# Altium PCB Sub8KillBoard.PcbDoc
Units mil, origin at the board's own origin, x right, y up, seen from the top; angles counter-clockwise.
Board outline 3250 x 2500 mil, 2 copper layers (Top Layer, Bottom Layer); 77 components, 51 nets, 253 pads, 65 vias.
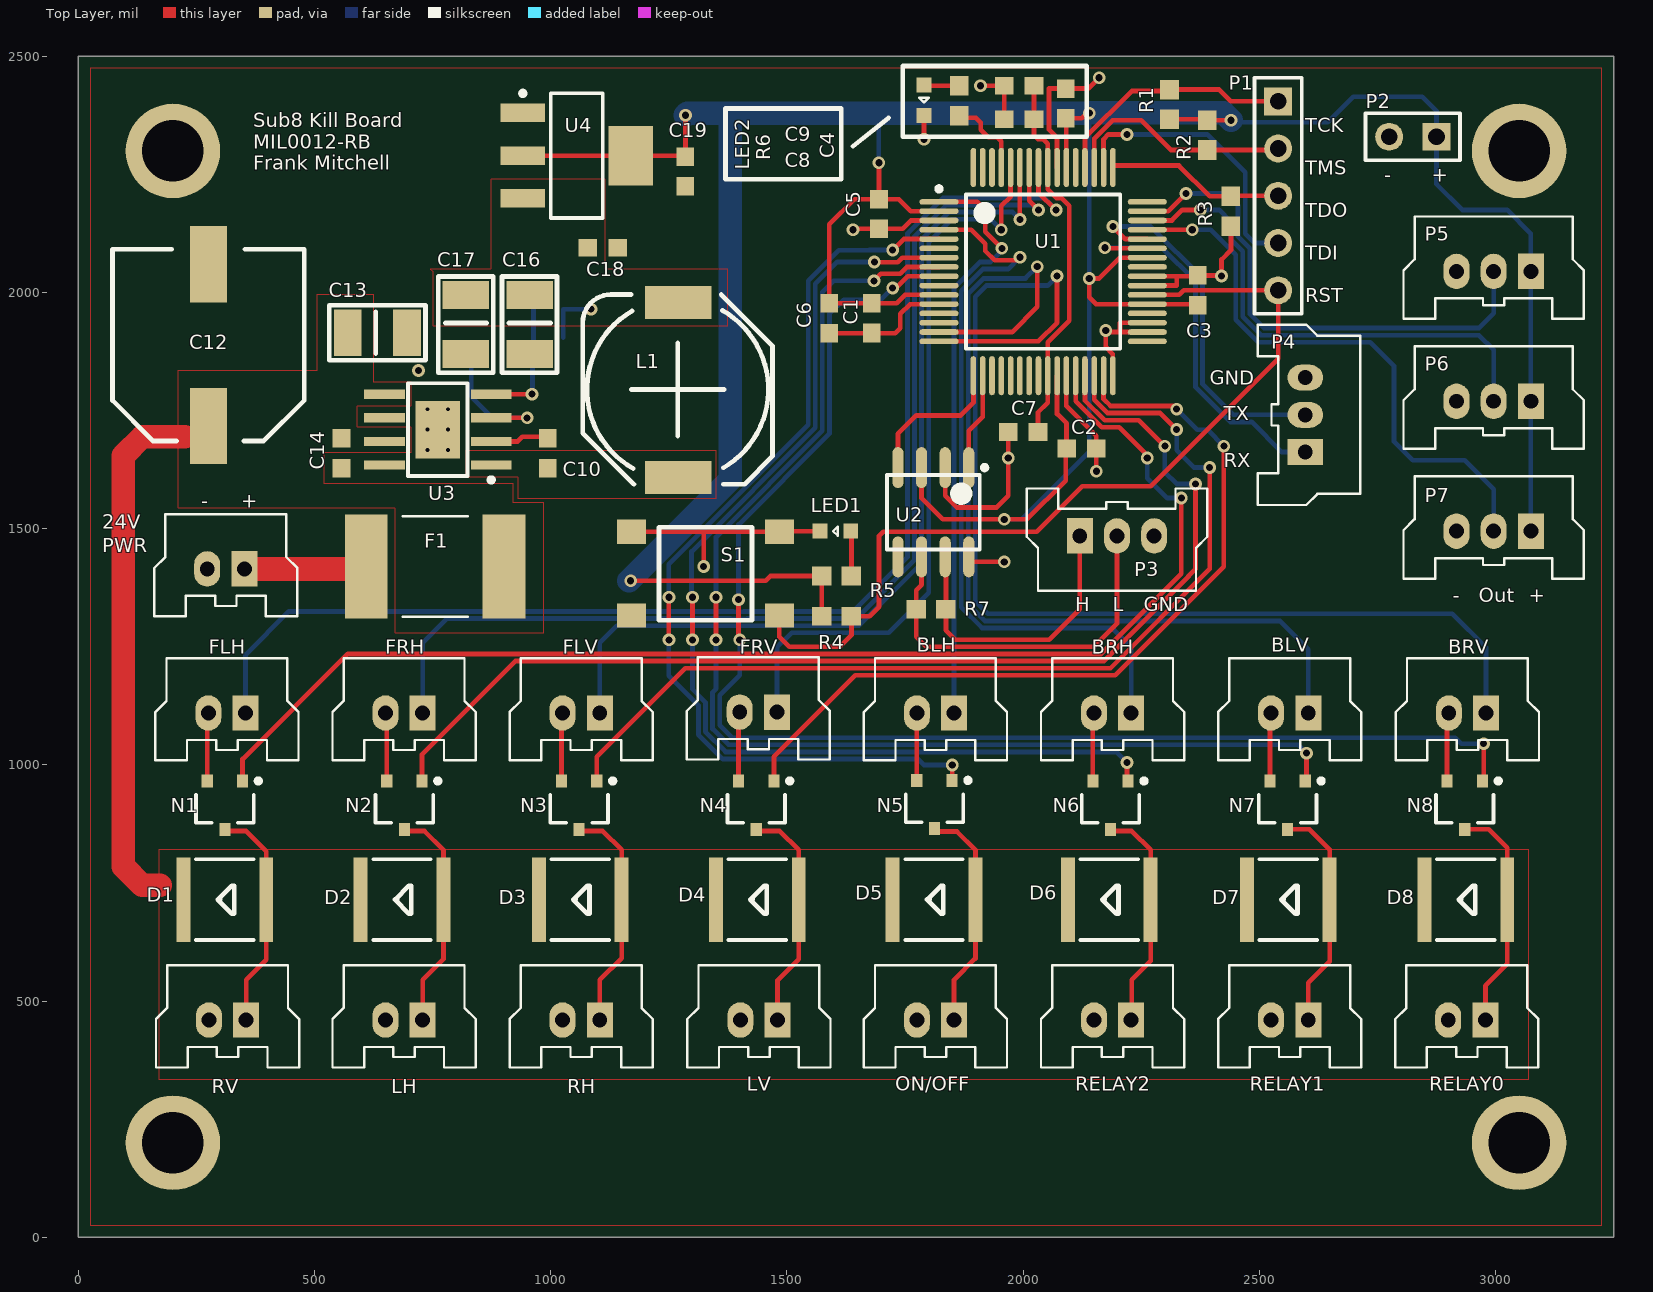
[diagram p0: Top Layer view]
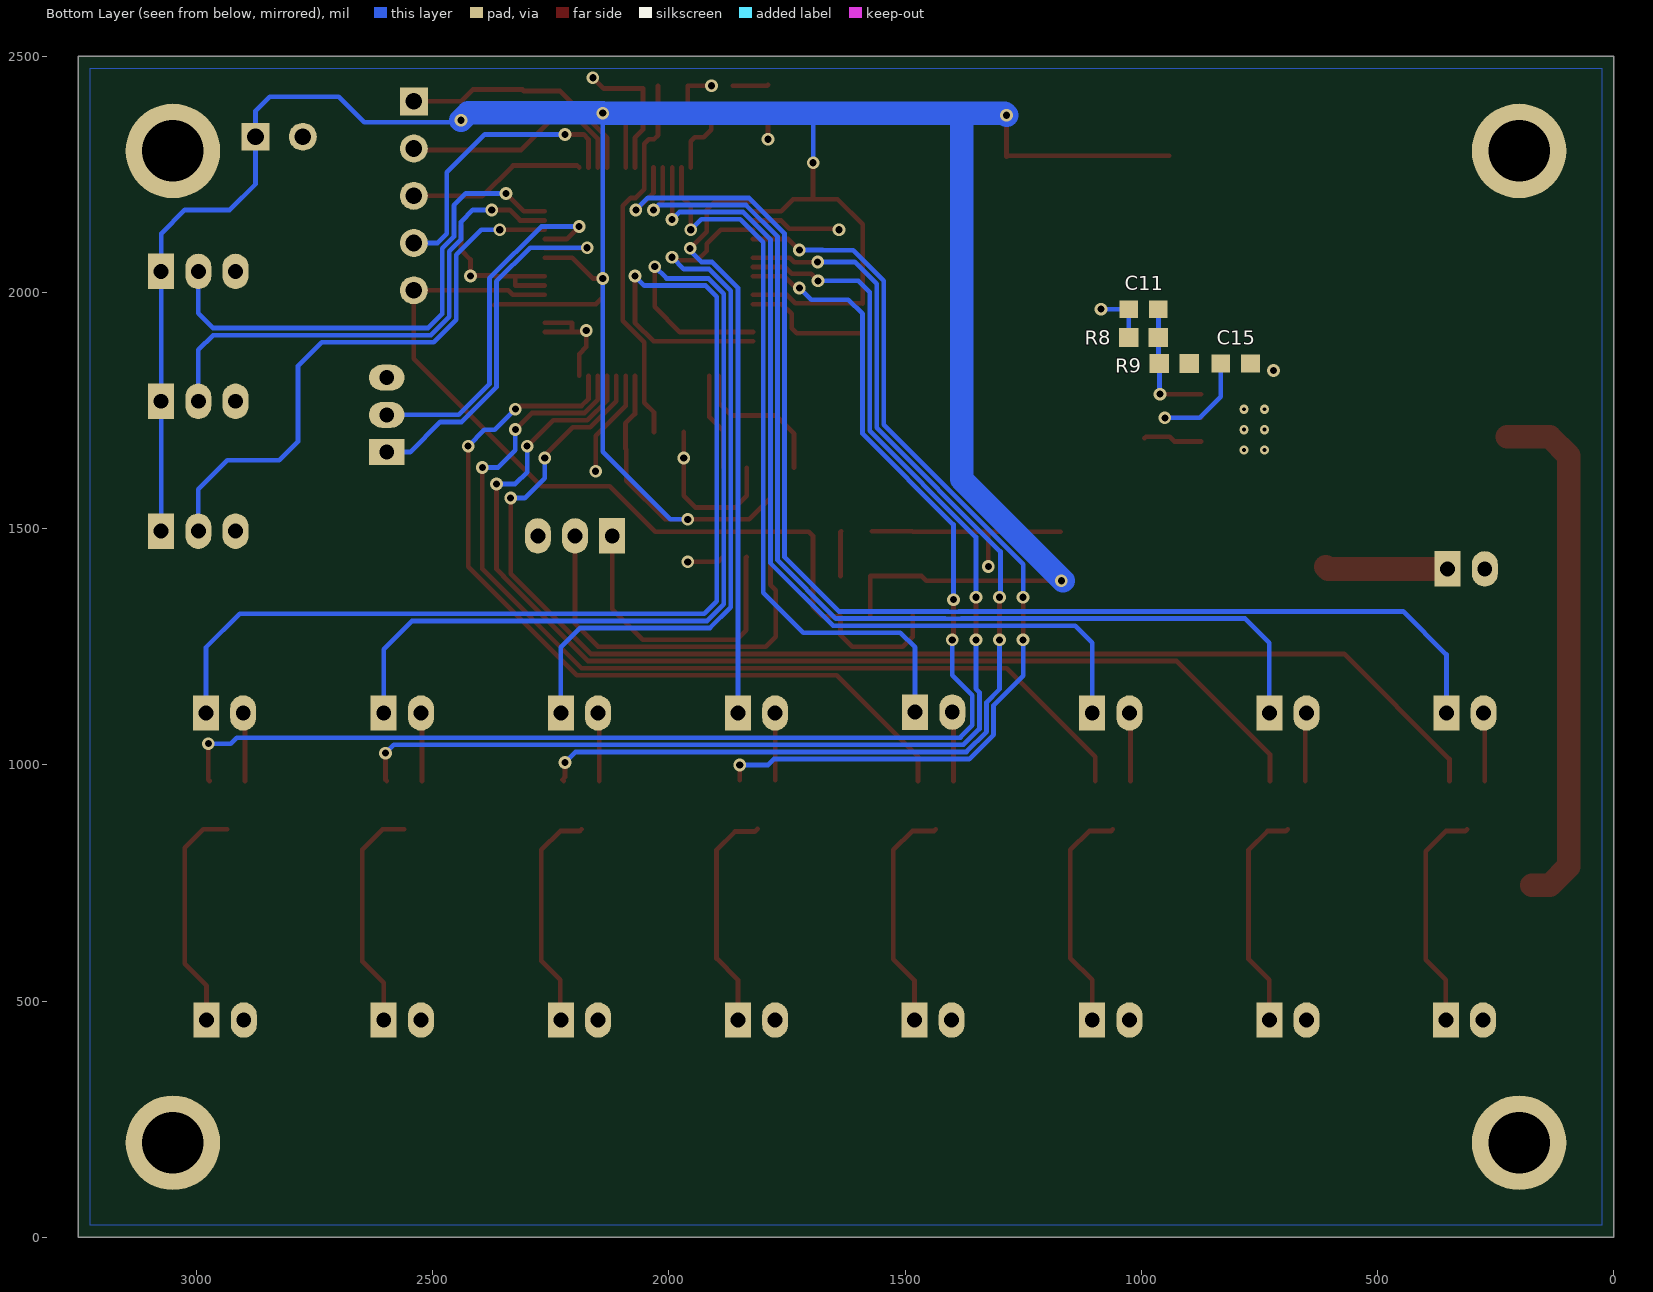
[diagram p1: Bottom Layer view, seen from below]

## Layer stack, top to bottom
Top Solder: solder mask 0.4, Solder Resist, Dk 3.5
Top Layer: signal copper 1.4
Dielectric 1: dielectric 12.6, FR-4, Dk 4.8
Bottom Layer: signal copper 1.4
Bottom Solder: solder mask 0.4, Solder Resist, Dk 3.5

## Board outline
0,0 3250,0 3250,2500 0,2500

## Design rules (kind name [scope] priority, off if disabled: settings)
Clearance [All] p1: gap=10 ignorepadtopadclearanceinfootprint=FALSE except(0: Arc-Hole Track-Hole SMDPad-Hole THPad-Hole Via-Hole Fill-Hole Poly-Hole Region-Hole Text-Hole; 5: Track-Track Track-SMDPad SMDPad-SMDPad; 7: Track-Via)
HoleSize [All] p1: absolutevalues=TRUE maxlimit=150 minlimit=10 maxpercent=80.000 minpercent=20.000
MinimumAnnularRing [All] p1: minimumring=7
MinimumSolderMaskSliver [All] p1: minsoldermaskwidth=1
PolygonConnect [All] p1: connectstyle=Direct reliefconductorwidth=10 reliefentries=4 polygonreliefangle="90 Angle" airgapwidth=10
RoutingVias [All] p1: holewidth=10 width=22 viastyle="Through Hole" minholewidth=10 minwidth=22 maxholewidth=100 maxwidth=150
SilkToSolderMaskClearance [IsPad] p1: minsilkscreentomaskgap=5 clearancetoexposedcopper=TRUE
SolderMaskExpansion [All] p1: expansion=4
Width [All] p1: maxlimit=150 minlimit=8 preferedwidth=10
27 further rules are at their usual default settings.

## Classes and differential pairs
component class Power: C10 C11 C12 C13 C14 C15 C16 C17 C18 C19 F1 L1 P24 R8 R9 U3 U4
component class Kill: D1 D2 D3 D4 D5 D6 D7 D8 N1 N2 N3 N4 N5 N6 N7 N8 P16 P17 P18 P19 P20 P21 P22 P23
component class Communication: P3 P4 P5 P6 P7 P8 P9 P10 P11 P12 P13 P14 P15 R7 U2
component class Command: C1 C2 C3 C4 C5 C6 C7 C8 C9 LED1 LED2 P1 P2 R1 R2 R3 R4 R5 R6 S1 U1

## Components (designator, comment, footprint, x,y, rotation, side; value= is the part's Value field where it differs from the comment)
24V "2-pin Vert Sherlock" MOLEX-HDR-1X2-SHERLOCK-VERT 351.34,1415 r0 top (schematic designator P24)
BLH "2-pin Vert Sherlock" MOLEX-HDR-1X2-SHERLOCK-VERT 1853.74,1110 r0 top (schematic designator P12)
BLV "2-pin Vert Sherlock" MOLEX-HDR-1X2-SHERLOCK-VERT 2603.74,1110 r0 top (schematic designator P14)
BRH "2-pin Vert Sherlock" MOLEX-HDR-1X2-SHERLOCK-VERT 2228.74,1110 r0 top (schematic designator P13)
BRV "2-pin Vert Sherlock" MOLEX-HDR-1X2-SHERLOCK-VERT 2980,1110 r0 top (schematic designator P15)
C1 "Cap" CAPC0603 1679.53,1946.1 r270 top value=0.1uF
C2 "Cap" CAPC0603 2123.5,1670 r0 top value=0.1uF
C3 "Cap" CAPC0603 2370,2005 r90 top value=0.1uF
C4 "Cap" CAPC0603 2090,2400.55 r90 top value=0.1uF
C5 "Cap" CAPC0603 1695,2166.5 r270 top value=0.1uF
C6 "Cap" CAPC0603 1589.53,1945.63 r270 top value=1.0uF
C7 "Cap" CAPC0603 2000,1705 r180 top value=0.1uF
C8 "Cap" CAPC0603 1991.5,2367.01 r180 top value=0.1uF
C9 "Cap" CAPC0603 1991.5,2437.99 r180 top value=2.2uF
C10 "Cap" CAPC0603 993.23,1660 r270 top value=470nF
C11 "Cap" CAPC0603 995,1965 r180 bottom value=75pF
C12 "EEHZA1H101P" EEHZA1H101P 275,1888.87 r180 top value=100uF
C13 "Cap" CAP1210 569.21,1915 r180 top value=10uF
C14 "Cap" CAPC0603 556.73,1660 r270 top value=100nF
C15 "Cap" CAPC0603 800,1850 r180 bottom value=10uF
C16 "Cap" CAP1210 955,1995.79 r90 top value=47uF
C17 "Cap" CAP1210 820,1995.98 r90 top value=47uF
C18 "Cap" CAPC0603 1110,2095 r0 top value=1uF
C19 "Cap" CAPC0603 1285,2256.5 r270 top value=1uF
D1 "Diode" TEMD5510FX01 310,715 r180 top
D2 "Diode" TEMD5510FX01 685,715 r180 top
D3 "Diode" TEMD5510FX01 1062.4,715 r180 top
D4 "Diode" TEMD5510FX01 1437.4,715 r180 top
D5 "Diode" TEMD5510FX01 1811.42,715 r180 top
D6 "Diode" TEMD5510FX01 2182.4,715 r180 top
D7 "Diode" TEMD5510FX01 2561.42,715 r180 top
D8 "Diode" TEMD5510FX01 2937.4,715 r180 top
F1 "PTC Fuse" PTC7451X11N 755,1420 r0 top value=1.1A
FLH "2-pin Vert Sherlock" MOLEX-HDR-1X2-SHERLOCK-VERT 353.74,1110 r0 top (schematic designator P8)
FLV "2-pin Vert Sherlock" MOLEX-HDR-1X2-SHERLOCK-VERT 1103.74,1110 r0 top (schematic designator P10)
FRH "2-pin Vert Sherlock" MOLEX-HDR-1X2-SHERLOCK-VERT 728.74,1110 r0 top (schematic designator P9)
FRV "2-pin Vert Sherlock" MOLEX-HDR-1X2-SHERLOCK-VERT 1478.74,1111.97 r0 top (schematic designator P11)
L1 "MSS1048-563MLB" MSS1048-563MLB 1270,1793.98 r180 top value=56uH
LED1 "LED" LED0603 1602.48,1495 r180 top
LED2 "LED" LED0603 1790,2407.48 r270 top
LH "2-pin Vert Sherlock" MOLEX-HDR-1X2-SHERLOCK-VERT 728.74,460 r0 top (schematic designator P17)
LV "2-pin Vert Sherlock" MOLEX-HDR-1X2-SHERLOCK-VERT 1480,460 r0 top (schematic designator P19)
N1 "SSM3K329R,LF" SSM3K329R,LF 310,915 r270 top
N2 "SSM3K329R,LF" SSM3K329R,LF 690,915 r270 top
N3 "SSM3K329R,LF" SSM3K329R,LF 1060,915 r270 top
N4 "SSM3K329R,LF" SSM3K329R,LF 1435,915 r270 top
N5 "SSM3K329R,LF" SSM3K329R,LF 1812.32,916.18 r270 top
N6 "SSM3K329R,LF" SSM3K329R,LF 2185,915 r270 top
N7 "SSM3K329R,LF" SSM3K329R,LF 2560,915 r270 top
N8 "SSM3K329R,LF" SSM3K329R,LF 2935,915 r270 top
ON/OFF "2-pin Vert Sherlock" MOLEX-HDR-1X2-SHERLOCK-VERT 1853.74,460 r0 top (schematic designator P20)
P1 "Header 5" HDR1X5 2540,2405 r270 top
P2 "Header 2" HDR1X2 2875,2330 r180 top
P3 "MOLEX-HDR-1x3-SHERLOCK_VERT" MOLEX-HDR-1X3-SHERLOCK-VERT 2120,1485 r180 top
P4 "MOLEX-HDR-1x3-SHERLOCK_VERT" MOLEX-HDR-1X3-SHERLOCK-VERT 2597.4,1662.52 r270 top
P5 "MOLEX-HDR-1x3-SHERLOCK_VERT" MOLEX-HDR-1X3-SHERLOCK-VERT 3075,2045 r0 top
P6 "MOLEX-HDR-1x3-SHERLOCK_VERT" MOLEX-HDR-1X3-SHERLOCK-VERT 3075,1770 r0 top
P7 "MOLEX-HDR-1x3-SHERLOCK_VERT" MOLEX-HDR-1X3-SHERLOCK-VERT 3075,1495 r0 top
R1 "Res" RES0603 2310,2398.5 r90 top value=10k
R2 "Res" RES0603 2390,2333.5 r270 top value=10k
R3 "Res" RES0603 2440,2172.48 r270 top value=10k
R4 "Res" RES0603 1605,1315 r0 top value=10k
R5 "Res" RES0603 1605,1400.04 r0 top value=10k
R6 "Res" RES0603 1865,2406.5 r90 top value=10k
R7 "Res" RES0603 1805,1330 r0 top value=120
R8 "Res" RES0603 995,1905 r180 bottom value=40.2k
R9 "Res" RES0603 930,1850 r180 bottom value=10k
RELAY0 "2-pin Vert Sherlock" MOLEX-HDR-1X2-SHERLOCK-VERT 2978.74,460 r0 top (schematic designator P23)
RELAY1 "2-pin Vert Sherlock" MOLEX-HDR-1X2-SHERLOCK-VERT 2603.74,460 r0 top (schematic designator P22)
RELAY2 "2-pin Vert Sherlock" MOLEX-HDR-1X2-SHERLOCK-VERT 2228.74,460 r0 top (schematic designator P21)
RH "2-pin Vert Sherlock" MOLEX-HDR-1X2-SHERLOCK-VERT 1103.74,460 r0 top (schematic designator P18)
RV "2-pin Vert Sherlock" MOLEX-HDR-1X2-SHERLOCK-VERT 355,460 r0 top (schematic designator P16)
S1 "Button" PTS645xxxxSMTR92 1327.44,1405 r180 top
U1 "TM4C123GH6PMT7R" TM4C123GH6PMT7R_M 2042.36,2044.53 r0 top value=Value
U2 "SN65HVD230DR" SOIC-8pin 1810,1535 r270 top
U3 "LMR23610ADDAR" LMR23610ADDAR 760.69,1710 r180 top
U4 "TLV1117LV33DCYR" SOT23-4N 1055,2290 r0 top

## Footprints (in the part's own frame and the unit in brackets; to place one, negate y for a bottom-side part, rotate by r counter-clockwise, add the part's x,y. Pads: shape width x height; smd on the part's side, far side on the other; paste and mask are expansions set on the pad)
CAP1210 [mm]
  rect 1.5x2.5 smd: 1(-0.02,0) 2(-3.2,0)
  silkscreen extent -4.2,-1.48 0.97,1.48, body extent -3.22,-1.25 0,1.26, height 2.5
CAPC0603 [mm] "Chip Capacitor, 2-Leads, Body 1.60x0.80mm, IPC Medium Density"
  rect 1x0.95 smd: 1(-0.8,0) 2(0.8,0)
  body extent -0.88,-0.48 0.87,0.48, height 0.8
EEHZA1H101P [mm] "CAP ALUM POLY HYB 100UF 50V SMD"
  rect 2x4.1 smd: 1(0,4.35) 2(0,-4.35)
  silkscreen extent -5.15,-5.15 5.15,5.15, body extent -5.24,-5.99 5.25,5.99, height 10.54
HDR1X2 [mm] "Connector; Header; 2 Position"
  rect 1.5x1.5 hole 0.9: 1(0,0)
  round 1.5 hole 0.9: 2(2.54,0)
  silkscreen extent -1.27,-1.27 3.81,1.27
HDR1X5 [mm] "Connector; Header; 5 Position"
  rect 1.5x1.5 hole 0.9: 1(0,0)
  round 1.5 hole 0.9: 2(2.54,0) 3(5.08,0) 4(7.62,0) 5(10.16,0)
  silkscreen extent -1.27,-1.27 11.43,1.27
LED0603 [mm] "Chip LED, 2-Leads, Body 1.60x0.80mm, IPC Medium Density"
  rect 0.8x0.8 smd: A(-0.825,0) C(0.825,0)
  silkscreen extent -0.13,-0.25 0.12,0.25, body extent -0.88,-0.48 0.87,0.47, height 0.8
LMR23610ADDAR [mm] "IC REG BUCK ADJ 1A SYNC 8SOPWRPD"
  rect 2.2x0.5 smd: 1(-2.875,1.905) 2(-2.875,0.635) 3(-2.875,-0.635) 4(-2.875,-1.905) 5(2.875,-1.905) 6(2.875,-0.635) 7(2.875,0.635) 8(2.875,1.905)
  rect 2.4x3.1 smd: 9(0,0)
  silkscreen extent -3,-2.5 1.6,2.83, body extent -2,-2.5 2,2.5, height 1.7
MOLEX-HDR-1X2-SHERLOCK-VERT [mm]
  rect 1.397x1.905 hole 0.8: 1(0,0)
  oval 1.397x1.905 hole 0.8: 2(-2,0)
  silkscreen extent -4.85,-2.55 2.85,2.95, body extent -4.87,-2.59 2.83,2.96, height 8.5
MOLEX-HDR-1X3-SHERLOCK-VERT [mm]
  rect 1.397x1.905 hole 0.8: 1(0,0)
  oval 1.397x1.905 hole 0.8: 2(-2,0) 3(-4,0)
  silkscreen extent -6.85,-2.55 2.85,2.95, body extent -6.88,-2.57 2.82,2.98, height 8.57
MSS1048-563MLB [mm] "FIXED IND 56UH 1.7A 126 MOHM"
  rect 3.56x1.78 smd: 1(0,4.7) 2(0,-4.7)
  silkscreen extent -5.06,-5.13 5.14,5.07, body extent -5.1,-5.15 5.1,5.15, height 5
PTC7451X11N [mm] "Chip PTC, 2920, 7351 metric 2-Leads, Body 7.36x5.12mm, IPC Medium Density"
  rect 2.3x5.6 smd: 1(-3.7,0) 2(3.7,0)
  silkscreen extent -1.75,-2.7 1.75,2.7, body extent -3.99,-2.72 3.99,2.72, height 1.15
PTS645xxxxSMTR92 [mm] "PTS645 Series SMT 6 mm Tactile Switch"
  rect 1.555x1.3 smd: A(-3.975,2.25) A(3.975,2.25) B(-3.975,-2.25) B(3.975,-2.25)
  silkscreen extent -2.5,-2.5 2.5,2.5, body extent -3,-3 3,3, height 4.5
RES0603 [mm] "Chip Resistor, 2-Leads, Body 1.60x0.80mm, IPC Medium Density"
  rect 1.05x1 smd: 1(-0.8,0) 2(0.8,0)
  body extent -0.88,-0.48 0.87,0.47, height 0.8
SOIC-8pin [mm] "For 296-1345-1-ND"
  oval 2.2x0.6 smd: 1(-2.4,1.905) 2(-2.4,0.635) 3(-2.4,-0.635) 4(-2.4,-1.905) 5(2.4,-1.905) 6(2.4,-0.635) 7(2.4,0.635) 8(2.4,1.905)
  silkscreen extent -2.52,-2.5 2,2.88, body extent -2,-2.5 2,2.5, height 1.75
SOT23-4N [mm] "SOT223, 4-Leads, Body 6.50x7.00mm (avg), Pitch 2.30mm, IPC Medium Density"
  rect 2.4x1 smd: 1(-2.9,2.3) 2(-2.9,0) 3(-2.9,-2.3)
  rect 2.4x3.2 smd: 4(2.9,0)
  silkscreen extent -3.02,-3.35 1.4,3.47, body extent -1.85,-3.35 1.85,3.35, height 1.7
SSM3K329R,LF [mm] "MOSFET N CH 30V 3.5A 2-3Z1A"
  rect 0.7x0.6 smd: 1(-1.3,0.95) 2(-1.3,-0.95) 3(1.3,0)
  silkscreen extent -1.42,-1.55 0.95,1.93, body extent -0.95,-1.55 0.95,1.55, height 0.8
TEMD5510FX01 [mm] "PHOTODIODE PIN HI SPEED MINI SMD"
  rect 0.75x4.55 smd: A(-2.225,0) C(2.225,0)
  silkscreen extent -1.55,-2.18 1.55,2.17, body extent -2.57,-2.2 2.58,2.19, height 1.12
TM4C123GH6PMT7R_M [mm]
  oval 2.1x0.3 smd paste-0.102 mask+0.051: 1(-5.6,3.75) 2(-5.6,3.25) 3(-5.6,2.75) 4(-5.6,2.25) 5(-5.6,1.75) 6(-5.6,1.25) 7(-5.6,0.75) 8(-5.6,0.25) 9(-5.6,-0.25) 10(-5.6,-0.75) 11(-5.6,-1.25) 12(-5.6,-1.75) 13(-5.6,-2.25) 14(-5.6,-2.75) 15(-5.6,-3.25) 16(-5.6,-3.75) 33(5.6,-3.75) 34(5.6,-3.25) 35(5.6,-2.75) 36(5.6,-2.25) 37(5.6,-1.75) 38(5.6,-1.25) 39(5.6,-0.75) 40(5.6,-0.25) 41(5.6,0.25) 42(5.6,0.75) 43(5.6,1.25) 44(5.6,1.75) 45(5.6,2.25) 46(5.6,2.75) 47(5.6,3.25) 48(5.6,3.75)
  oval 0.3x2.1 smd paste-0.102 mask+0.051: 17(-3.75,-5.6) 18(-3.25,-5.6) 19(-2.75,-5.6) 20(-2.25,-5.6) 21(-1.75,-5.6) 22(-1.25,-5.6) 23(-0.75,-5.6) 24(-0.25,-5.6) 25(0.25,-5.6) 26(0.75,-5.6) 27(1.25,-5.6) 28(1.75,-5.6) 29(2.25,-5.6) 30(2.75,-5.6) 31(3.25,-5.6) 32(3.75,-5.6) 49(3.75,5.6) 50(3.25,5.6) 51(2.75,5.6) 52(2.25,5.6) 53(1.75,5.6) 54(1.25,5.6) 55(0.75,5.6) 56(0.25,5.6) 57(-0.25,5.6) 58(-0.75,5.6) 59(-1.25,5.6) 60(-1.75,5.6) 61(-2.25,5.6) 62(-2.75,5.6) 63(-3.25,5.6) 64(-3.75,5.6)
  silkscreen extent -5.72,-4.15 4.15,4.57, body extent 0,0 0.25,0.25, height 0.25

## Part data
24V BLH BLV BRH BRV FLH FLV FRH FRV LH LV ON/OFF RELAY0 RELAY1 RELAY2 RH RV: library part MOLEX-HDR-1x2-SHERLOCK_VERT, "Header, Molex, 2mm Pitch Sherlock Header, Single Row, Vertical, 2 Circuits, Length 3.3mm, 0353620250"
C1 C2 C3 C4 C5 C6 C7 C8 C9 C14: Supplier Part Number 1=1276-1000-1-ND, Supplier 1=Digi-Key
C12: "CAP ALUM POLY HYB 100UF 50V SMD", Manufacturer 1=Panasonic, Supplier Part Number 1=P15442CT-ND, Tolerance=20%, Voltage=50V, ComponentLink1Description="Web Site", ComponentLink1URL=https://na.industrial.panasonic.com/products/capacitors/aluminum-electrolytic-capacitors/conductive-polymer-hybrid-aluminum-electrolytic/series/za-high-temp-reflow/ABA0135/model/EEHZA1H101P, ComponentLink2Description="Data Sheet", ComponentLink2URL=https://industrial.panasonic.com/cdbs/www-data/pdf/RDD0000/ABA0000C1221.pdf, ComponentLink3Description="ZA Series Technical Data", ComponentLink3URL=https://industrial.panasonic.com/cdbs/www-data/pdf/RDD0000/ABA0000COS44.pdf, Manufacturer Part Number 1=EEHZA1H101P, Supplier 1=Digi-Key
C16 C17: Supplier Part Number 1=490-6538-1-ND, Supplier 1=Digi-Key
C18 C19: Manufacturer Part Number=C0603C105K8PACTU, Supplier Part Number 1=399-3118-1-ND, Supplier 1=Digi-Key
D1 D2 D3 D4 D5 D6 D7 D8: "Standard Diode Template"
F1: library part PTC_Fuse, Supplier Part Number 1=507-1744-1-ND, Supplier 1=Digi-Key
L1: "FIXED IND 56UH 1.7A 126 MOHM", Manufacturer 1=Coilcraft, ComponentLink1Description="Web Site", ComponentLink1URL=https://www.coilcraft.com/mss1048.cfm, Manufacturer Part Number 1=MSS1048-563MLB, Supplier 1=Coilcraft, Supplier Part Number 1=MSS1048-563MLB
LED1: Color=Green, Supplier Part Number 1=754-1122-1-ND, Supplier 1=Digi-Key
LED2: Color=Red, Supplier Part Number 1=754-1122-1-ND, Supplier 1=Digi-Key
N1 N2 N3 N4 N5 N6 N7 N8: "MOSFET N CH 30V 3.5A 2-3Z1A", Manufacturer 1="Toshiba Semiconductor and Storage", Supplier Part Number 1=SSM3K329RLFTR-ND, Manufacturer Part Number 1=SSM3K329R,LF, Supplier 1=Digi-Key
P1: "Header, 5-Pin", LatestRevisionDate=17-Jul-2002, LatestRevisionNote="Re-released for DXP Platform.", Publisher="Altium Limited"
P2: "Header, 2-Pin", LatestRevisionDate=17-Jul-2002, LatestRevisionNote="Re-released for DXP Platform.", Publisher="Altium Limited"
P3 P4 P5 P6 P7: "Header, Molex, 2mm Pitch Sherlock Header, Single Row, Vertical, 3 Circuits, Length 3.3mm, 0353620376"
R1 R2 R3 R4 R5 R6 R9: Supplier Part Number 1=RMCF0603JT10K0CT-ND, Supplier 1=Digi-Key
R8: Supplier Part Number 1=RMCF0603FT40K2CT-ND, Supplier 1=Digi-Key
S1: "SPST Button", Supplier Part Number 1=CKN9087CT-ND, Supplier 1=Digi-Key
U1: "Imported", Alternate_PartNumber=TM4C123GH6PMT, Manufacturer="Texas Instruments", PartNumber=TM4C123GH6PMTR, CompType=IC, MountType=SMT, PackageReference=PM0064A, PIN_COUNT=64, RefDes=RefDes, RoHS=Y, TYPE=TYPE
U2: "3.3V CAN Bus Transciever"
U3: "IC REG BUCK ADJ 1A SYNC 8SOPWRPD", Manufacturer 1="Texas Instruments", Supplier Part Number 1=296-47267-1-ND, ComponentLink1Description=Datasheet, ComponentLink1URL=http://www.ti.com/lit/ds/symlink/lmr23610.pdf, ComponentLink2Description="Web Site", ComponentLink2URL=http://www.ti.com/product/LMR23610/description, Manufacturer Part Number 1=LMR23610ADDAR, Supplier 1=Digi-Key
U4: "IC REG LINEAR 3.3V 1A SOT223-4", Digi-Key Part Number=296-28778-1-ND
C10 C11 C13 C15 R7: Supplier 1=Digi-Key

## Free pads (board coordinates)
  round 200 hole 130: ""(200,200) ""(200,2300) ""(3050,200) ""(3050,2300)

## Via types
v1: diameter 27, hole 15, Top Layer to Bottom Layer, tented both sides, 50 vias
v2: diameter 27, hole 15, Top Layer to Bottom Layer, 9 vias
v3: diameter 19.68, hole 7.87, Top Layer to Bottom Layer, tented both sides, 6 vias

## Nets (pads, with @x,y where several pads share a name; then routed paths per layer and width w, separated by ;. In a path a pad name is that pad's centre, name@x,y a point inside that pad or via, vN(x,y) a via of type N, cw(c..) or ccw(c..) an arc to the next point about the centre after c; other vN are vias at no path point)
3V3: C1.1 C2.1 C3.1 C4.1 C5.1 C6.1 C19.1 P2.1 P5.1 P6.1 P7.1 R1.1 R2.1 R4.1 R5.1 U1.2 U1.11 U1.26 U1.37 U1.42 U1.54 U2.3 U4.2 U4.4 | length 7849.9
  Top Layer w10: U4.2 U4.4 1282.99,2290 C19.1 1285,2371.54 1282.99,2373.54 v1(1285,2375.55) ; v2(1169.17,1390) 1454.96,1390 1464.96,1400 1520,1400 R5.1 R5.1 R4.1 ; v1(1694.53,2275) 1695,2274.53 C5.1 ; U2.3 1785,1565 1830,1520 v1(1960,1520) 2008.19,1520 2090,1601.81 2090,1667.99 C2.1 2092.01,1722.99 2071.89,1743.11 U1.26 ; U1.11 1750,1995.32 1732.28,1977.6 C1.1 1590,1977.6 C6.1 1589.53,2144.53 1642.99,2197.99 C5.1 ; U1.2 1762.52,2172.48 1737.01,2197.99 C5.1 ; U1.54 2091.57,2367.48 C4.1 2124.06,2369.06 2140,2385 v1(2140,2380) ; U1.42 2205,2074.06 2160.94,2030 v1(2140,2030) 2140,1990 2154.37,1975.63 U1.37 2367.87,1975.63 C3.1 ; R1.1 2387.99,2367.01 R2.1 v1(2440,2365)
  Bottom Layer w10: v1(1694.53,2275) 1694.53,2379.53 1695,2380 ; v1(1960,1520) 1996.89,1520 2140,1663.11 v1(2140,2030) v1(2140,2380) ; v1(2440,2365) 2444.53,2360.47 2644.53,2360.47 2699.06,2415 2845,2415 2875,2385 P2.1 2875,2230 2930,2175 3025,2175 3075,2125 P5.1 P6.1 P7.1
  Bottom Layer w50: v2@1165.5,1390 1380,1604.5 1380,2380 ; v1(1285,2375.55) 1289.45,2380 1380,2380 ; v1(2440,2365) 2424.5,2380.5 2140.5,2380.5 v1(2140,2380) 1695,2380 1380,2380
5V: C11.1 C16.1 C17.1 C18.1 L1.2 R8.1 U4.3 | length 118.5
  Bottom Layer w10: R8.1 C11.1 v1(1085,1965)
24V: 24V.1 F1.1 | length 260.1
  Top Layer w50: 24V.1 604.33,1415 F1.1
BLH_CTRL: BLH.1 U1.1 | length 1247.3
  Top Layer w10: U1.1 1902.83,2192.17 1920,2175 1920,2128.79 v1(1955,2093.79)
  Bottom Layer w10: BLH.1 1853.74,2009.95 1908.79,2065 1931.39,2065 1955,2088.61 v1(1955,2093.79) v1@1947.57,2093.79
BLV_CTRL: BLV.1 U1.15 | length 2036.9
  Top Layer w10: U1.15 1976.57,1916.57 2030,1970 v1(2030,2055)
  Bottom Layer w10: v1(2030,2055) 2005,2030 1916.21,2030 1883.74,1997.53 1883.74,1340.4 1919.14,1305 2543.74,1305 2603.74,1245 BLV.1
BRH_CTRL: BRH.1 U1.4 | length 1567.5
  Top Layer w10: U1.4 1890.32,2133.11 1920,2103.43 1920,2088.15 1939.86,2068.29 1986.44,2068.29 v1(1993.15,2075)
  Bottom Layer w10: v1(1993.15,2075) 1968.15,2050 1915,2050 1868.74,2003.74 1868.74,1334.19 1912.93,1290 2187.48,1290 2228.74,1248.74 BRH.1
BRV_CTRL: BRV.1 U1.16 | length 2461.5
  Top Layer w10: U1.16 2032.52,1896.89 2071.89,1936.26 v1(2071.89,2035)
  Bottom Layer w10: v1(2071.89,2035) 2051.89,2015 1922.43,2015 1898.74,1991.31 1898.74,1346.61 1925.35,1320 2908.74,1320 2980,1248.74 BRV.1
CAN_RX: U1.17 U2.4 | length 315.8
  Top Layer w10: U2.4 1735,1701.5 1773.5,1740 1867.52,1740 1894.72,1767.2 U1.17
CAN_TX: U1.18 U2.1 | length 206.7
  Top Layer w10: U2.1 1885,1707.48 1914.41,1736.89 U1.18
CANH: P3.1 R7.2 U2.7 | length 629.8
  Top Layer w10: U2.7 1836.5,1439.02 R7.2 1836.5,1285 1856.5,1265 2055,1265 2120,1330 P3.1
CANL: P3.2 R7.1 U2.6 | length 814.4
  Top Layer w10: U2.6 1785,1381.5 1773.5,1370 R7.1 1773.5,1271.5 1795,1250 2150,1250 2198.74,1298.74 P3.2
Debug: R6.1 U1.61 | length 175.3
  Top Layer w10: R6.1 1870,2370 1900,2370 1910,2360 1910,2345 1926.22,2328.78 1945,2328.78 1953.78,2320 U1.61
FLH_CTRL: FLH.1 U1.57 | length 2759
  Top Layer w10: U1.57 2032.52,2211.06 2068.58,2175 v1(2070,2175)
  Bottom Layer w10: FLH.1 353.74,1233.74 445,1325 1386.54,1325 1387.04,1324.5 1408.16,1324.5 1408.66,1325 1640,1325 1755,1440 1755,2125 1830.5,2200.5 2044.5,2200.5 v1(2070,2175)
FLV_CTRL: FLV.1 U1.59 | length 1933.9
  Top Layer w10: v1(1993.15,2155) U1.59
  Bottom Layer w10: FLV.1 1103.74,1258.74 1140,1295 1374.11,1295 1374.61,1294.5 1420.59,1294.5 1421.09,1295 1652.43,1295 1785,1427.57 1785,2112.57 1842.93,2170.5 1977.65,2170.5 v1(1993.15,2155)
FRH_CTRL: FRH.1 U1.58 | length 2340.6
  Top Layer w10: U1.58 2012.83,2194.68 v1(2032.52,2175)
  Bottom Layer w10: FRH.1 728.74,1258.74 780,1310 1380.32,1310 1380.82,1309.5 1414.37,1309.5 1414.87,1310 1646.21,1310 1770,1433.79 1770,2118.79 1836.71,2185.5 2022.02,2185.5 v1(2032.52,2175)
FRV_CTRL: FRV.1 U1.60 | length 1571
  Top Layer w10: v1(1953.78,2133.11) 1953.78,2183.78 1973.46,2203.46 U1.60
  Bottom Layer w10: FRV.1 1478.74,1248.74 1510,1280 1715,1280 1800,1365 1800,2106.36 1849.14,2155.5 1931.39,2155.5 v1(1953.78,2133.11)
GND: 24V.2 BLH.2 BLV.2 BRH.2 BRV.2 C1.2 C2.2 C3.2 C4.2 C5.2 C6.2 C7.2 C8.2 C9.2 C12.2 C13.2 C14.2 C15.2 C16.2 C17.2 C18.2 C19.2 FLH.2 FLV.2 FRH.2 FRV.2 LED1.C LED2.C N1.2 N2.2 N3.2 N4.2 N5.2 N6.2 N7.2 N8.2 P2.2 P3.3 P4.3 P5.3 P6.3 P7.3 R3.2 R9.2 S1.B U1.3 U1.12 U1.27 U1.32 U1.34 U1.35 U1.39 U1.40 U1.55 U2.2 U2.8 U3.6 U3.8 U3.9 U4.1 | length 3908
  Top Layer w10: N1.2 272.6,1107.6 FLH.2 ; FRH.2 652.6,1107.4 N2.2 ; N3.2 1022.6,1107.6 FLV.2 ; S1.B@1170.94,1493.58 1323.58,1493.58 v1(1323.58,1420) 1323.58,1490.75 1326.42,1493.58 1483.94,1493.58 1485.35,1495 LED1.C ; N4.2 1397.6,1109.57 FRV.2 ; C6.2 1729.13,1914.13 1740,1925 1740,1955 1760.63,1975.63 U1.12 ; v1(1640,2133.11) 1641.89,2135 C5.2 1745,2135 1762.8,2152.8 U1.3 ; N5.2 1774.92,1109.92 BLH.2 ; v1(1790,2324.68) LED2.C ; U2.2 1835,1570 1860,1545 1943.5,1545 1968.5,1570 v1(1968.5,1650) C7.2 ; U2.8 1895.51,1430 v1(1960,1430) ; v1(1910,2437.99) C9.2 C8.2 ; U1.55 2071.89,2328.11 2055,2345 2055,2432.05 C4.2 2137.95,2432.05 v1(2160.94,2455) ; U1.27 2091.57,1760 2155,1696.57 C2.2 v1(2155,1621.81) ; N6.2 2147.6,1107.6 BRH.2 ; U1.32 2190,1870 2175,1885 v1(2175,1920) 2178.43,1916.57 2203.74,1916.57 ; U1.34 2203.74,1916.57 ; U1.35 2205,1936.26 2205,1917.83 2203.74,1916.57 ; U1.39 2325,2015 2325,2034.68 ; U1.40 2325,2034.68 ; R3.2 2440,2090 2420,2070 2420,2037.99 2418.5,2036.5 C3.2 2368.19,2034.68 2325,2034.68 ; N7.2 2522.6,1107.6 BLV.2 ; N8.2 2897.6,1106.34 BRV.2
  other v1: 720,1835 2420,2035
  other v3: 739.04,1666.69 782.34,1666.69 739.04,1710 782.34,1710 739.04,1753.31 782.34,1753.31
HALL_GO: P5.2 U1.47 | length 1088.8
  Top Layer w10: U1.47 2307.48,2172.48 v1(2345,2210)
  Bottom Layer w10: v1(2345,2210) 2430,2210 2455,2185 2455,2118.79 2480,2093.79 2480,1955 2510,1925 2965,1925 2996.26,1956.26 P5.2
HALL_HARDKILL: P7.2 U1.45 | length 1229.2
  Top Layer w10: U1.45 v1(2358.11,2133.11)
  Bottom Layer w10: v1(2358.11,2133.11) 2396.89,2133.11 2450,2080 2450,1942.57 2497.57,1895 2735,1895 2785,1845 2785,1685 2825,1645 2935,1645 2996.26,1583.74 P7.2 P7.2@3000,1498.74
HALL_SOFTKILL: P6.2 U1.46 | length 1077.3
  Top Layer w10: U1.46 2315,2152.8 2337.2,2175 v1(2375,2175)
  Bottom Layer w10: v1(2375,2175) 2415,2175 2440,2150 2440,2112.57 2465,2087.57 2465,1948.79 2503.79,1910 2965,1910 2996.26,1878.74 P6.2
LH_KILL: N2.1 U1.29 | length 2429
  Top Layer w10: N2.1 727.4,1022.4 925,1220 2171.21,1220 2350,1398.79 2350,1400 2365,1415 v2(2365,1595) ; U1.29 2130.94,1771.63 2172.57,1730 2245,1730 v2(2300,1675)
  Bottom Layer w10: v2(2300,1675) 2300,1620 2325,1595 v2(2365,1595)
LH_RELAY: D2.A LH.1 N2.3 | length 478.9
  Top Layer w10: N2.3 693.82,860 732.6,860 772.6,820 D2.A 772.6,588.86 728.74,545 LH.1
LV_KILL: N4.1 U1.31 | length 1770.9
  Top Layer w10: N4.1 1472.4,1017.4 1645,1190 2195,1190 2425,1420 v2(2425,1675) ; U1.31 2170.32,1774.68 2185,1760 2318.31,1760 v2(2325,1753.31)
  Bottom Layer w10: v2(2325,1753.31) 2368.81,1709.5 2390.5,1709.5 v2(2425,1675)
LV_RELAY: D4.A LV.1 N4.3 | length 486.8
  Top Layer w10: N4.3 1438.82,860 1485,860 1525,820 D4.A 1525,588.74 1480,543.74 LV.1
NetC10_1: C10.1 U3.2 | length 125.6
  Top Layer w10: U3.2@873.19,1685 930,1685 940,1695 989.73,1695 C10.1
NetC10_2: C10.2 L1.1 U3.1
NetC11_2: C11.2 R8.2 R9.1 U3.4 | length 268.3
  Top Layer w10: U3.4@873.19,1785 v1(960,1785)
  Bottom Layer w10: v1(960,1785) 961.5,1786.5 R9.1 963.5,1852.01 R8.2 C11.2
NetC15_1: C15.1 U3.3 | length 284
  Top Layer w10: U3.3@873.19,1735 v1(950,1735)
  Bottom Layer w10: C15.1 831.5,1780 876.5,1735 v1(950,1735)
NetLED1_A: LED1.A R5.2 | length 95.6
  Top Layer w10: LED1.A 1636.5,1493.46 R5.2
NetLED2_A: LED2.A R6.2 | length 75.8
  Top Layer w10: LED2.A 1791.97,2437.99 R6.2
ON/OFF: N5.1 U1.5 | length 2019.9
  Top Layer w10: v1(1250,1265) v1(1250,1355) ; v1(1723.82,2090) 1747.24,2113.43 U1.5 ; N5.1 1850,967.64 v1(1850,1000)
  Bottom Layer w10: v1(1250,1265) 1250,1188.79 1312.5,1126.29 1312.5,1063.86 1363.86,1012.5 1777.5,1012.5 1790,1000 v1(1850,1000) ; v1(1250,1355) 1250,1425 1545,1720 1545,2025 1610,2090 1673.94,2090 1674.44,2090.5 1723.32,2090.5 v1(1723.82,2090)
ON/OFF_RELAY: D5.A N5.3 ON/OFF.1 | length 484.1
  Top Layer w10: N5.3 1818.31,859.02 1860,859.02 1899.02,820 D5.A 1899.02,590.28 1853.74,545 ON/OFF.1
RELAY0: N8.1 U1.9 | length 2948.6
  Top Layer w10: v1(1397.6,1350) 1397.6,1267.4 v1(1400,1265) ; v1(1723.82,2010) 1731.21,2010 1755.9,2034.68 U1.9 ; N8.1 2975,968.78 v1(2975,1045)
  Bottom Layer w10: v1(1397.6,1350) 1397.6,1508.96 1590,1701.36 1590,1955 1620,1985 1698.82,1985 v1(1723.82,2010) ; v1(1400,1265) 1400,1190 1357.5,1147.5 1357.5,1084.36 1382.5,1059.36 1382.5,1057.5 2915,1057.5 2927.5,1045 v1(2975,1045)
RELAY0_CTRL: D8.A N8.3 RELAY0.1 | length 490.1
  Top Layer w10: N8.3 2986.01,863.82 3025,824.83 D8.A 3025,579.02 2978.74,532.76 RELAY0.1
RELAY1: N7.1 U1.8 | length 2628.8
  Top Layer w10: v1(1350,1265) v1(1350,1355) ; v1(1684.06,2025) 1699.06,2040 1740,2040 1754.37,2054.37 U1.8 ; N7.1 2600,968.78 v1(2600,1025)
  Bottom Layer w10: v1(1350,1265) 1350,1161.21 1342.5,1153.71 1342.5,1076.29 1376.29,1042.5 2582.5,1042.5 v1(2600,1025) ; v1(1350,1355) 1350,1482.57 1575,1707.57 1575,2001.31 1598.69,2025 v1(1684.06,2025)
RELAY1_CTRL: D7.A N7.3 RELAY1.1 | length 486.5
  Top Layer w10: N7.3 2606.18,863.82 2649.02,820.98 D7.A 2649.02,584.02 2603.74,538.74 RELAY1.1
RELAY2: N6.1 U1.7 | length 2316
  Top Layer w10: v1(1300,1265) v1(1300,1355) ; v1(1685,2065) 1685.5,2064.5 1734.38,2064.5 1743.94,2074.06 U1.7 ; v1(2220,1005) 2220,973.78 2225,968.78 N6.1
  Bottom Layer w10: v1(1300,1265) 1300,1160 1327.5,1132.5 1327.5,1070.07 1370.07,1027.5 2197.5,1027.5 v1(2220,1005) ; v1(1300,1355) 1298.08,1356.92 1298.08,1451.87 1560,1713.79 1560,2018.79 1606.21,2065 v1(1685,2065)
RELAY2_CTRL: D6.A N6.3 RELAY2.1 | length 479.7
  Top Layer w10: N6.3 2188.82,860 2230,860 2270,820 D6.A 2270,585 2230,545 RELAY2.1@2230,460
RH_KILL: N3.1 U1.30 | length 2108.4
  Top Layer w10: N3.1 1097.4,1017.4 1285,1205 2185,1205 2395,1415 v2(2395,1630) ; U1.30 2150.63,1773.16 2178.79,1745 2290,1745 v2(2325,1710)
  Bottom Layer w10: v2(2325,1710) 2325.5,1709.5 2325.5,1666.19 2361.69,1630 v2(2395,1630)
RH_RELAY: D3.A N3.3 RH.1 | length 487.3
  Top Layer w10: N3.3 1063.82,860 1110,860 1150,820 D3.A 1150,591.26 1103.74,545 RH.1
RST_N: P1.5 R4.2 S1.A U1.38 | length 1900.3
  Top Layer w10: S1.A@1483.94,1316.42 1483.94,1271.06 1505,1250 1611.5,1250 1636.5,1275 R4.2 1675,1315 1695,1335 1695,1485 1703.82,1493.82 2028.82,1493.82 2125,1590 2270,1590 2540,1860 P1.5 2340,2005 2330.32,1995.32 U1.38
RV_KILL: N1.1 U1.28 | length 2747.6
  Top Layer w10: N1.1 347.4,1012.4 570,1235 2165,1235 2335,1405 v2(2335,1565) ; U1.28 2111.26,1770.1 2166.36,1715 2203.74,1715 2262.83,1655.91 v2(2262.83,1650)
  Bottom Layer w10: v2(2262.83,1650) 2262.83,1607.17 2305,1565 v2(2335,1565)
RV_RELAY: D1.A N1.3 RV.1 | length 481.9
  Top Layer w10: N1.3 313.82,860 355,860 397.6,817.4 D1.A 397.6,587.6 355,545 RV.1
TCK/SWCLK: P1.1 R1.2 U1.52 | length 524.5
  Top Layer w10: U1.52 2130.94,2327.74 2230,2426.8 2306.8,2426.8 R1.2 2415,2430 2440,2405 P1.1
TDI: P1.4 U1.50 | length 605.1
  Top Layer w10: U1.50 2170.32,2324.68 2180.63,2335 v1(2220,2335)
  Bottom Layer w10: v1(2220,2335) 2390,2335 2470,2255 2470,2125 2490,2105 P1.4
TDO/SWO: P1.3 R3.1 U1.49 | length 379
  Top Layer w10: U1.49 2193.98,2268.98 2330,2268.98 2395,2203.98 R3.1 2441.02,2205 P1.3
TMS/SWDIO: P1.2 R2.2 U1.51 | length 494
  Top Layer w10: U1.51 2150.63,2326.21 2189.42,2365 2250,2365 2312.99,2302.01 R2.2 2537.01,2302.01 P1.2
UART_RX: P4.1 U1.43 | length 825
  Top Layer w10: v1(2172.99,2095) 2174.25,2093.74 U1.43
  Bottom Layer w10: v1(2172.99,2095) 2293.79,2095 2365,2023.79 2365,1800.05 2438.79,1726.26 2483.74,1726.26 2547.48,1662.52 P4.1
UART_TX: P4.2 U1.44 | length 787.5
  Top Layer w10: v1(2190,2140) 2216.57,2113.43 U1.44
  Bottom Layer w10: v1(2190,2140) 2270,2140 2380,2030 2380,1806.26 2445,1741.26 P4.2
VDDC: C7.1 C8.1 C9.1 U1.25 U1.56 | length 803.2
  Top Layer w10: C9.1 C8.1 2022.99,2333.5 2031.5,2325 2042.2,2325 2052.2,2315 U1.56 2052.2,2218.86 2070.56,2200.5 2080.56,2200.5 2097.39,2183.67 2097.39,1940.18 2052.2,1895 U1.25 2052.2,1767.2 2031.5,1746.5 C7.1
Vfused: C12.1 C13.1 C14.1 D1.C D2.C D3.C D4.C D5.C D6.C D7.C D8.C F1.2 LH.2 LV.2 ON/OFF.2 RELAY0.2 RELAY1.2 RELAY2.2 RH.2 RV.2 U3.5 U3.7 | length 1110.8
  Top Layer w50: 172.71,745 135,745 95,785 95,1655 135,1695 225,1695
pads on no net: U1.6 U1.10 U1.13 U1.14 U1.19 U1.20 U1.21 U1.22 U1.23 U1.24 U1.33 U1.36 U1.41 U1.48 U1.53 U1.62 U1.63 U1.64 U2.5

## Polygon pours and split planes (outlines as drawn)
GND on Top Layer "Top-GND" (solid, remove dead copper, shelved, pour order 42): 25,2475 25,25 3225,25 3225,2475
Vfused on Top Layer "PWR-Vfused" (solid, remove dead copper, shelved, pour order 38): 625,1995 505,1995 505,1835 210,1835 210,1545 670,1545 670,1280 985,1280 985,1555 920,1555 920,1595 520,1595 520,1661.81 705,1661.81 705,1672.52 705,1715 590,1715 590,1760 705,1760 705,1810 625,1810
Vfused on Top Layer "Top-RELAY_Vfused" (solid, remove dead copper, shelved, pour order 40): 170,820 170,335 3070,335 3070,820
5V on Top Layer "PWR-5V" (solid, remove dead copper, shelved, pour order 8): 745,2050 750,2045 750,1930 1375,1930 1375,2050 1115,2050 1115,2240 873.19,2240 873.19,2050
NetC10_2 on Top Layer "PWR-Cap" (solid, remove dead copper, shelved, pour order 0): 820,1610 930,1610 930,1565 1350,1565 1350,1665.16 820,1665.16
GND on Bottom Layer "Bottom-GND" (solid, remove dead copper, shelved, pour order 48): 25,2475 25,25 3225,25 3225,2475

## Silkscreen, mask and mechanical layers (free items; w line width, h text height)
Top Overlay:
  lines w10: 1640,2310 1715,2370 ; 1745,2455 1745,2480 1901.25,2480 1978.75,2480 2047.5,2480 2135,2480 2135,2330 1745,2330 1745,2470 ; 1370,2240 1615,2240 1615,2390 1370,2390 1370,2240
  text "Sub8 Kill Board / MIL0012-RB / Frank Mitchell" at 370,2260 h30
  text "-" at 2765,2235 h30
  text "+" at 2865,2235 h30
  text "TCK /  / TMS /  / TDO /  / TDI /  / RST" at 2597.4,1980 h30
  text "GND" at 2395,1805 h30
  text "TX" at 2425,1730 h30
  text "RX" at 2425,1630 h30
  text "-" at 260,1545 h30
  text "+" at 345,1545 h30
  text "PWR" at 50,1450 h30
  text "-" at 2910,1345 h30
  text "Out" at 2965,1345 h30
  text "+" at 3070,1345 h30
  text "H" at 2110,1325 h30
  text "L" at 2190,1325 h30
  text "GND" at 2255,1325 h30
BO:
  the board outline again, w10